# Altium PCB STM_System_Board.PCBDOC (part 14 of 16)
Units mm, origin at the board's own origin, x right, y up, seen from the top; angles counter-clockwise.
Board outline 222.53 x 100.01 mm, 6 copper layers (Top Layer, Int1 (GND), Int2 (Sign), Layer 1, Layer 2, Bottom Layer), stack 1.526 mm thick; 702 components, 774 nets, 3596 pads, 1988 vias.
Unrouted connection lines stored in the file: 1.
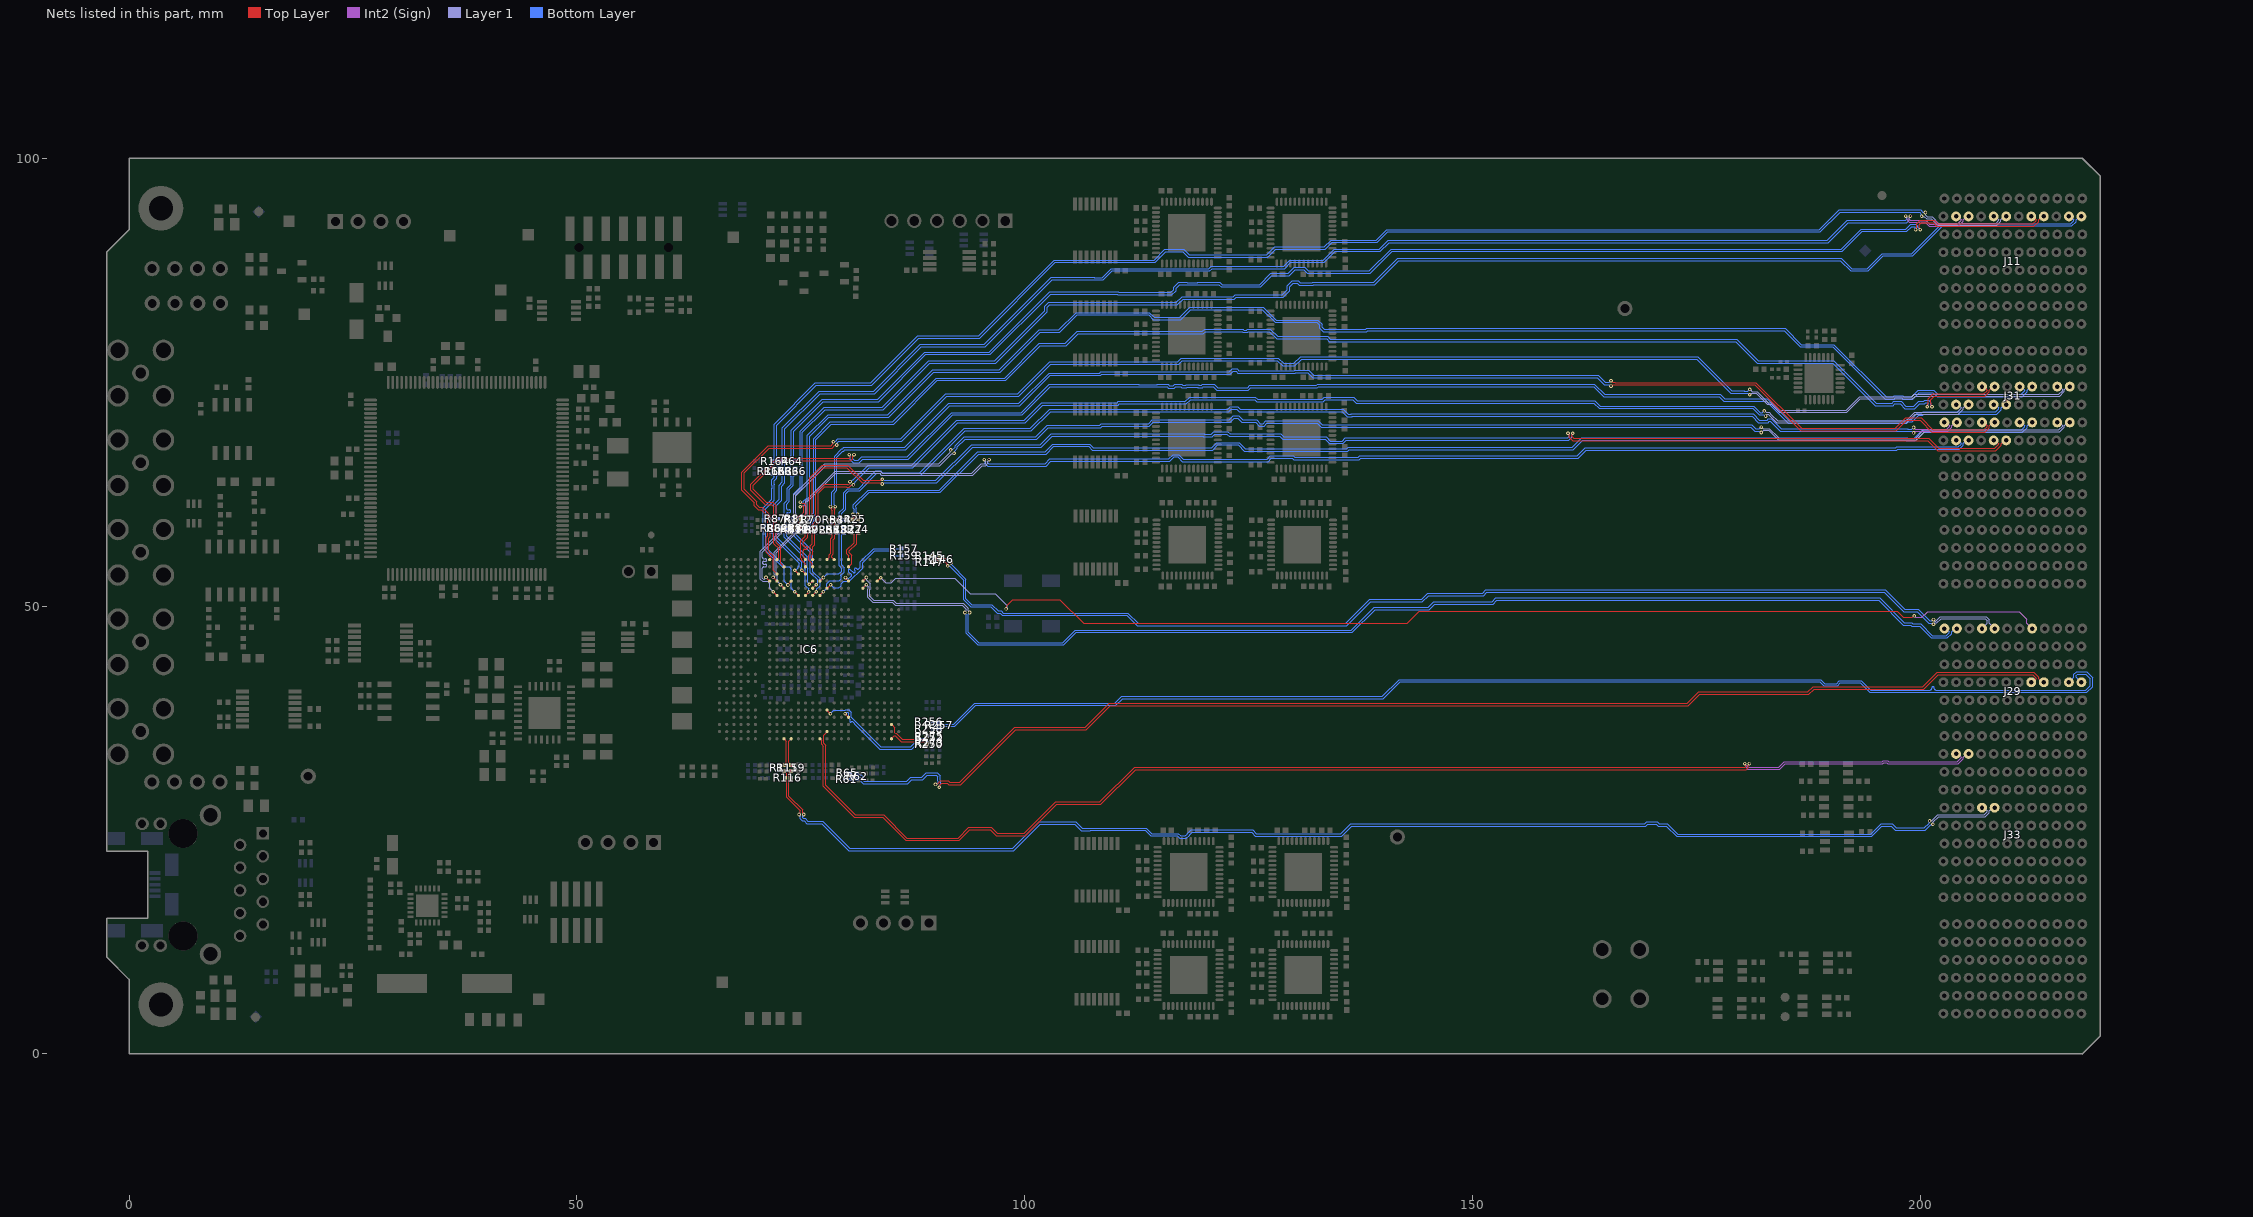
[diagram p17: the nets of this part, all layers, seen from the top]

## Via types
v1: diameter 0.4, hole 0.2, Top Layer to Bottom Layer, tented both sides, 1806 vias
v2: diameter 0.7, hole 0.4, Top Layer to Bottom Layer, tented both sides, 92 vias
v3: diameter 0.7, hole 0.4, Top Layer to Bottom Layer, 90 vias

## Nets (pads, with @x,y where several pads share a name; then routed paths per layer and width w, separated by ;. In a path a pad name is that pad's centre, name@x,y a point inside that pad or via, vN(x,y) a via of type N, cw(c..) or ccw(c..) an arc to the next point about the centre after c; other vN are vias at no path point) (continued)
SLOT7.LVDS_4_P: IC6.D4 J29.E8 | length 135.3
  Top Layer w0.095: IC6.D4@83.515,52.759 v1(83.915,53.159) ; v1(97.898,49.675) 97.956,49.733 97.956,50.009 98.664,50.717 103.894,50.717 106.56,48.051 142.673,48.051 144.038,49.415 197.375,49.415 198.025,48.765 199.067,48.765 199.197,48.895 v1(199.275,48.895)
  Int2 (Sign) w0.102: v1(199.275,48.895) 199.432,48.739 200.123,48.739 200.773,49.389 210.995,49.389 211.846,48.539 211.846,48.083 J29.E8@212.439,47.49
  Layer 1 w0.102: v1(83.915,53.159) 83.917,53.159 84.123,52.953 84.123,52.939 84.47,52.592 85.092,52.592 85.586,53.086 92.164,53.086 93.889,51.361 96.71,51.361 98.055,50.017 98.055,49.884 97.898,49.727 v1(97.898,49.675)
SLOT7.LVDS_5_N: IC6.P1 J31.H1 | length 149.4
  Top Layer w0.095: IC6.P1@75.515,55.184 75.331,55.367 75.331,55.439 75.275,55.495 75.275,55.85 75.275,56.193 cw(c75.423,56.193) 75.423,56.34 75.599,56.34 ccw(c75.599,56.488) 75.599,56.635 75.423,56.635 cw(c75.423,56.783) 75.275,56.783 75.275,57.175 75.767,57.667 75.767,59.592 76.242,60.067 76.242,64.192 77.508,65.458 80.117,65.458 81.822,63.753 83.473,63.753 83.495,63.775 83.845,63.775 83.997,63.623 v1(84.075,63.623) ; v1(161.155,69.275) 161.155,69.205 161.025,69.075 161.025,68.942 161.241,68.725 200.9,68.725 202.025,67.6 208.273,67.6 208.705,68.032 208.705,68.111 208.326,68.49 J31.H1@208.139,68.49
  Bottom Layer w0.095: v1(84.075,63.623) 84.153,63.623 84.283,63.753 90.18,63.753 94.161,67.733 101.833,67.733 103.038,68.938 119.886,68.938 119.923,68.9 120.924,68.9 121.2,69.177 122.547,69.177 122.786,68.938 128.46,68.938 128.776,68.622 133.504,68.622 133.977,68.149 135.51,68.149 135.873,68.512 160.715,68.512 161.025,68.822 161.025,69.067 161.155,69.197 v1(161.155,69.275)
SLOT7.LVDS_5_P: IC6.P2 J31.G1 | length 150.5
  Top Layer w0.095: IC6.P2@75.515,54.384 75.467,54.432 75.467,54.692 75.064,55.094 75.064,55.329 75.008,55.385 75.008,57.286 75.5,57.777 75.5,59.702 75.975,60.177 75.975,64.302 77.398,65.725 80.227,65.725 81.932,64.02 83.363,64.02 83.384,64.041 83.884,64.041 83.992,64.15 v1(84.075,64.15) ; v1(160.628,69.275) 160.628,69.205 160.758,69.075 160.758,68.831 161.131,68.459 200.789,68.459 201.914,67.333 208.384,67.333 208.972,67.921 208.972,68.111 209.352,68.49 J31.G1@209.539,68.49
  Bottom Layer w0.095: v1(84.075,64.15) 84.153,64.15 84.283,64.02 90.07,64.02 94.05,68 101.723,68 102.928,69.205 119.996,69.205 120.034,69.167 120.813,69.167 121.09,69.444 122.658,69.444 122.896,69.205 128.571,69.205 128.887,68.889 133.614,68.889 134.088,68.415 135.4,68.415 135.763,68.778 160.604,68.778 160.758,68.932 160.758,69.067 160.628,69.197 v1(160.628,69.275)
SLOT7.LVDS_6_N: IC6.U5 J31.K1 | length 145.4
  Top Layer w0.095: v1(72.724,52.375) IC6.U5@73.115,51.984
  Layer 1 w0.102: v1(72.724,52.375) 72.335,52.764 72.335,53.565 72.238,53.662 72.238,55.935 75.726,59.424 75.726,61.649 78.905,64.828 83.781,64.828 83.984,64.625 94.163,64.625 95.22,65.682 95.606,65.682 95.843,65.92 95.843,66.141 96,66.298 v1(96,66.35)
  Bottom Layer w0.095: v1(96,66.35) 96,66.272 95.87,66.142 95.87,66.008 95.983,65.895 102.267,65.895 102.798,66.425 116.073,66.425 116.558,66.91 117.169,66.91 117.698,66.382 127.028,66.382 127.396,66.75 129.981,66.75 130.139,66.592 137.215,66.592 137.398,66.775 161.675,66.775 162.55,67.65 197.225,67.65 197.34,67.765 204.194,67.765 204.505,68.077 204.505,68.156 204.171,68.49 J31.K1@203.939,68.49
SLOT7.LVDS_6_P: IC6.V4 J31.J1 | length 145.4
  Top Layer w0.095: v1(71.899,53.2) IC6.V4@72.315,52.784
  Layer 1 w0.102: v1(71.899,53.2) 71.929,53.2 72.121,53.392 72.121,53.476 72.024,53.574 72.024,56.024 75.513,59.513 75.513,61.738 78.817,65.042 83.87,65.042 84.073,64.839 94.074,64.839 95.131,65.896 95.517,65.896 95.63,66.008 95.63,66.141 95.473,66.298 v1(95.473,66.35)
  Bottom Layer w0.095: v1(95.473,66.35) 95.473,66.272 95.603,66.142 95.603,65.897 95.872,65.628 102.378,65.628 102.908,66.158 116.183,66.158 116.669,66.644 117.059,66.644 117.588,66.115 127.138,66.115 127.506,66.483 129.87,66.483 130.028,66.325 137.325,66.325 137.508,66.508 161.786,66.508 162.661,67.383 197.336,67.383 197.451,67.499 204.304,67.499 204.772,67.967 204.772,68.156 205.106,68.49 J31.J1@205.339,68.49
SLOT7.LVDS_7_N: IC6.V6 J31.C2 | length 162.2
  Top Layer w0.095: v1(71.9,51.599) IC6.V6@72.315,51.184
  Layer 1 w0.102: v1(71.9,51.599) 71.537,51.962 71.537,52.496 71.271,52.762 70.736,52.762 70.486,53.012 70.486,56.089 74.211,59.814 74.211,62.414 77.661,65.864 90.39,65.864 91.69,67.164 91.69,67.386 v1(91.727,67.423) ; v1(182.2,69.97) 182.281,69.97 182.437,69.814 183.111,69.814 184.02,68.905 184.225,68.7 199.397,68.7 200.347,69.65 215.428,69.65 215.832,70.054 215.832,70.138 215.48,70.49 J31.C2@215.239,70.49
  Bottom Layer w0.095: v1(91.727,67.423) 91.782,67.478 91.966,67.478 92.204,67.715 92.204,67.865 93.214,68.875 101.198,68.875 102.517,70.195 108.359,70.195 108.521,70.357 113.799,70.357 114.21,70.768 122.808,70.768 123.279,71.239 123.871,71.239 124.333,70.777 125.869,70.777 126.289,70.358 126.599,70.358 126.908,70.667 132.734,70.667 133.184,70.217 181.138,70.217 181.565,69.79 181.986,69.79 182.167,69.97 v1(182.2,69.97)
SLOT7.LVDS_7_P: IC6.W4 J31.B2 | length 161.7
  Top Layer w0.095: v1(71.099,53.2) IC6.W4@71.515,52.784
  Layer 1 w0.102: v1(71.099,53.2) 71.099,53.166 70.909,52.976 70.825,52.976 70.7,53.101 70.7,53.875 70.7,54.227 cw(c70.851,54.227) 70.851,54.378 71.02,54.378 ccw(c71.02,54.529) 71.02,54.68 70.851,54.68 cw(c70.851,54.831) 70.851,54.981 71.02,54.981 ccw(c71.02,55.132) 71.02,55.283 70.851,55.283 cw(c70.851,55.434) 70.7,55.434 70.7,55.725 70.7,56 74.425,59.725 74.425,62.325 77.75,65.65 90.479,65.65 91.842,67.013 92.063,67.013 v1(92.1,67.05) ; v1(182.2,69.37) 182.239,69.37 182.469,69.6 183.022,69.6 183.806,68.816 184.136,68.486 199.486,68.486 200.436,69.436 215.517,69.436 216.046,69.965 216.046,70.138 216.398,70.49 J31.B2@216.639,70.49
  Bottom Layer w0.095: v1(92.1,67.05) 92.155,67.105 92.155,67.289 92.47,67.604 92.47,67.754 93.324,68.608 101.308,68.608 102.628,69.928 108.469,69.928 108.632,70.09 113.91,70.09 114.321,70.502 122.919,70.502 123.39,70.973 123.76,70.973 124.223,70.51 125.759,70.51 126.178,70.091 126.71,70.091 127.019,70.4 132.623,70.4 133.074,69.95 181.027,69.95 181.454,69.523 181.992,69.523 182.144,69.37 v1(182.2,69.37)
SLOT7.LVDS_8_N: J31.F2 R25.1 R27.2 | length 138.9
  Top Layer w0.095: R27.2@80.729,58.9 80.729,58.92 80.926,59.117 80.926,59.444 80.912,59.458 80.912,59.5 R25.1@80.75,59.662 ; R25.1@80.73,59.662 R25.1@80.75,59.662 ; v1(80.798,60.25) 80.798,60.172 80.928,60.042 80.928,59.882 80.912,59.866 80.912,59.825 R25.1@80.75,59.662
  Bottom Layer w0.095: v1(80.798,60.25) 80.798,60.328 80.928,60.458 80.928,60.83 80.859,60.899 80.859,61.309 82.492,62.942 90.467,62.942 94.725,67.2 102.248,67.2 103.126,68.078 107.224,68.078 107.632,67.67 120.835,67.67 121.417,68.252 123.921,68.252 124.623,67.55 134.324,67.55 135.925,67.55 136.076,67.701 161.074,67.701 162.148,68.775 198.47,68.775 198.52,68.725 199.298,68.725 200.248,69.675 211.248,69.675 211.605,70.032 211.605,70.111 211.226,70.49 J31.F2@211.039,70.49
SLOT7.LVDS_8_P: J31.E2 R24.2 R25.2 | length 138.9
  Top Layer w0.095: v1(81.325,60.25) 81.325,60.167 81.195,60.037 81.195,59.88 81.207,59.868 81.207,59.825 R25.2@81.37,59.662 ; R25.2@81.39,59.662 R25.2@81.37,59.662 ; R24.2@81.415,58.9 81.415,58.92 81.193,59.142 81.193,59.444 81.207,59.458 81.207,59.5 R25.2@81.37,59.662
  Bottom Layer w0.095: v1(81.325,60.25) 81.325,60.328 81.195,60.458 81.195,60.941 81.126,61.01 81.126,61.198 82.602,62.675 90.577,62.675 94.836,66.933 102.358,66.933 103.236,67.812 107.114,67.812 107.522,67.403 120.945,67.403 121.527,67.985 123.81,67.985 124.512,67.283 134.214,67.283 136.036,67.283 136.187,67.434 161.184,67.434 162.258,68.508 198.36,68.508 198.41,68.458 199.408,68.458 200.358,69.408 211.359,69.408 211.872,69.921 211.872,70.111 212.252,70.49 J31.E2@212.439,70.49
SLOT7.LVDS_9_N: J31.I2 R54.1 R57.2 | length 146
  Top Layer w0.095: R57.2@78.262,58.848 78.262,58.868 78.424,59.03 78.436,59.03 78.492,59.086 78.492,59.404 78.478,59.418 78.478,59.46 R54.1@78.315,59.622 ; R54.1@78.295,59.622 R54.1@78.315,59.622 ; v1(78.298,61.1) 78.298,61.022 78.428,60.892 78.428,60.701 78.492,60.637 78.492,59.84 78.478,59.826 78.478,59.785 R54.1@78.315,59.622 ; v1(165.425,75.145) 165.458,75.145 165.639,74.964 165.867,74.964 165.89,74.942 181.608,74.942 186.733,69.817 197.164,69.817 198.339,70.992 200.033,70.992 201.35,69.675 207.048,69.675 207.405,70.032 207.405,70.111 207.026,70.49 J31.I2@206.839,70.49
  Bottom Layer w0.095: v1(78.298,61.1) 78.298,61.178 78.428,61.308 78.428,62.705 78.758,63.036 78.758,66.715 79.584,67.541 79.646,67.541 79.805,67.7 86.598,67.7 91.523,72.625 99.325,72.625 102.711,76.011 108.334,76.011 108.459,76.135 122.828,76.135 123.159,76.466 123.691,76.466 123.894,76.263 124.538,76.263 124.545,76.256 124.855,76.256 124.862,76.263 130.054,76.263 130.103,76.312 131.713,76.312 132.258,75.767 163.987,75.767 164.79,74.964 165.211,74.964 165.392,75.145 v1(165.425,75.145)
SLOT7.LVDS_9_P: J31.H2 R53.2 R54.2 | length 146
  Top Layer w0.095: v1(78.825,61.1) 78.825,61.022 78.695,60.892 78.695,60.812 78.759,60.748 78.759,59.84 78.773,59.826 78.773,59.785 R54.2@78.935,59.622 ; R54.2@78.955,59.622 R54.2@78.935,59.622 ; R53.2@78.999,58.848 78.999,58.868 78.836,59.03 78.819,59.03 78.759,59.091 78.759,59.404 78.773,59.418 78.773,59.46 R54.2@78.935,59.622 ; v1(165.425,74.545) 165.481,74.545 165.633,74.697 165.757,74.697 165.779,74.675 181.498,74.675 186.623,69.55 197.275,69.55 198.45,70.725 199.923,70.725 201.24,69.408 207.159,69.408 207.672,69.921 207.672,70.111 208.052,70.49 J31.H2@208.239,70.49
  Bottom Layer w0.095: v1(78.825,61.1) 78.825,61.178 78.695,61.308 78.695,62.595 79.025,62.925 79.025,66.605 79.695,67.275 79.756,67.275 79.915,67.433 86.708,67.433 91.633,72.358 99.436,72.358 102.821,75.744 108.445,75.744 108.569,75.869 122.939,75.869 123.27,76.199 123.58,76.199 123.784,75.996 124.427,75.996 124.434,75.989 124.966,75.989 124.973,75.996 130.164,75.996 130.214,76.046 131.602,76.046 132.148,75.5 163.877,75.5 164.679,74.697 165.217,74.697 165.369,74.545 v1(165.425,74.545)
SLOT7.LVDS_10_N: J31.L2 R34.1 R48.2 | length 134.2
  Int2 (Sign) w0.102: v1(199.2,69.93) 199.216,69.93 199.409,69.737 201.465,69.737 202.915,69.737 203.232,70.054 203.232,70.138 202.88,70.49 J31.L2@202.639,70.49
  Bottom Layer w0.095: R48.2@79.03,58.848 79.03,58.868 79.192,59.03 79.234,59.03 79.296,59.092 79.296,59.405 79.281,59.419 79.281,59.46 R34.1@79.119,59.623 ; R34.1@79.099,59.623 R34.1@79.119,59.623 ; v1(199.2,69.93) 199.167,69.93 198.986,69.749 198.565,69.749 198.551,69.763 184.414,69.763 183.299,70.878 182.999,70.878 182.87,70.749 181.995,70.749 181.294,71.45 136.452,71.45 136.422,71.42 136.082,71.42 135.536,71.967 124.044,71.967 123.77,72.241 122.907,72.241 122.623,71.958 102.755,71.958 100.623,69.825 93.223,69.825 88.289,64.892 84.09,64.892 83.891,65.091 83.334,65.091 82.35,64.107 82.35,64.021 81.446,63.117 80.214,63.117 79.758,62.661 79.758,60.908 79.296,60.446 79.296,59.841 79.281,59.827 79.281,59.785 R34.1@79.119,59.623
SLOT7.LVDS_10_P: J31.K2 R32.2 R34.2 | length 134.1
  Int2 (Sign) w0.102: v1(199.2,69.33) 199.216,69.33 199.409,69.523 201.377,69.523 203.003,69.523 203.446,69.965 203.446,70.138 203.798,70.49 J31.K2@204.039,70.49
  Bottom Layer w0.095: R34.2@79.759,59.623 R34.2@79.739,59.623 ; R32.2@79.812,58.837 79.812,58.857 79.649,59.019 79.618,59.019 79.562,59.075 79.562,59.405 79.576,59.419 79.576,59.46 R34.2@79.739,59.623 ; v1(199.2,69.33) 199.144,69.33 198.992,69.482 198.454,69.482 198.44,69.496 184.304,69.496 183.188,70.612 183.11,70.612 182.98,70.482 181.884,70.482 181.183,71.183 136.563,71.183 136.533,71.153 135.972,71.153 135.425,71.7 123.934,71.7 123.659,71.974 123.017,71.974 122.734,71.691 102.866,71.691 100.733,69.558 93.333,69.558 88.4,64.625 83.98,64.625 83.78,64.825 83.445,64.825 82.617,63.997 82.617,63.91 81.557,62.85 80.325,62.85 80.025,62.55 80.025,60.798 79.562,60.335 79.562,59.841 79.576,59.827 79.576,59.785 R34.2@79.739,59.623
SLOT7.LVDS_11_N: J11.B7 R81.1 R83.2 | length 165.5
  Bottom Layer w0.095: R83.2@74.015,58.997 74.015,59.017 74.177,59.179 74.207,59.179 74.262,59.235 74.262,59.541 74.248,59.555 74.248,59.596 R81.1@74.086,59.759 ; R81.1@74.066,59.759 R81.1@74.086,59.759 ; J11.B7@216.539,93.49 216.726,93.49 217.105,93.111 217.105,93.032 216.773,92.7 202.35,92.7 199,89.35 195.723,89.35 194.048,87.675 192.275,87.675 191.133,88.817 141.64,88.817 138.954,86.131 132.139,86.131 132.1,86.092 130.715,86.092 130.491,86.315 129.863,86.315 129.283,85.736 129.283,85.279 128.754,84.75 123.456,84.75 123.244,84.538 122.412,84.538 117.56,84.538 116.91,83.887 102.659,83.887 102.233,83.461 102.233,82.986 96.623,77.375 89.248,77.375 84.074,72.201 77.624,72.201 74.908,69.486 74.908,63.258 74.183,62.533 74.183,60.26 74.262,60.181 74.262,59.977 74.248,59.963 74.248,59.921 R81.1@74.086,59.759
SLOT7.LVDS_11_P: J11.A7 R80.2 R81.2 | length 165.5
  Bottom Layer w0.095: R81.2@74.726,59.759 R81.2@74.706,59.759 ; R80.2@74.776,58.996 74.776,59.016 74.614,59.179 74.585,59.179 74.529,59.235 74.529,59.541 74.543,59.555 74.543,59.596 R81.2@74.706,59.759 ; J11.A7@217.939,93.49 217.752,93.49 217.372,93.111 217.372,92.921 216.884,92.433 202.461,92.433 199.111,89.083 195.833,89.083 194.158,87.408 192.164,87.408 191.023,88.55 141.75,88.55 139.064,85.864 132.25,85.864 132.21,85.825 130.605,85.825 130.381,86.049 129.974,86.049 129.55,85.625 129.55,85.169 128.865,84.483 123.566,84.483 123.354,84.271 122.302,84.271 117.671,84.271 117.02,83.62 102.77,83.62 102.5,83.35 102.5,82.875 96.733,77.108 89.358,77.108 84.184,71.934 77.734,71.934 75.175,69.375 75.175,63.148 74.45,62.423 74.45,60.37 74.529,60.291 74.529,59.977 74.543,59.963 74.543,59.921 R81.2@74.706,59.759
SLOT7.LVDS_12_N: J11.E7 R64.1 R66.2 | length 155.5
  Top Layer w0.095: v1(199.428,92.025) 199.428,92.108 199.558,92.238 199.558,92.661 199.94,93.042 201.508,93.042 201.9,92.65 212.523,92.65 212.905,93.032 212.905,93.111 212.526,93.49 J11.E7@212.339,93.49
  Bottom Layer w0.095: R64.1@74.355,66.152 R64.1@74.335,66.152 ; R66.2@74.404,65.388 74.404,65.408 74.241,65.571 74.219,65.571 74.158,65.631 74.158,65.934 74.172,65.948 74.172,65.99 R64.1@74.335,66.152 ; v1(199.428,92.025) 199.41,92.044 199.41,92.301 199.354,92.356 199.006,92.356 198.458,91.808 193.485,91.808 191.261,89.583 140.983,89.583 138.558,87.158 131.531,87.158 131.143,87.546 130.171,87.546 129.498,86.873 127.573,86.873 126.314,85.614 121.911,85.614 121.653,85.871 119.43,85.871 119.403,85.845 118.009,85.845 117.983,85.871 117.267,85.871 116.877,85.481 116.877,85.218 116.41,84.751 110.354,84.751 110.284,84.821 102.896,84.821 96.158,78.083 88.933,78.083 83.659,72.809 77.509,72.809 74.2,69.5 74.2,66.684 74.158,66.642 74.158,66.37 74.172,66.356 74.172,66.315 R64.1@74.335,66.152
SLOT7.LVDS_12_P: J11.D7 R63.2 R64.2 | length 156.5
  Top Layer w0.095: v1(199.955,92.025) 199.955,92.108 199.825,92.238 199.825,92.55 200.05,92.775 201.398,92.775 201.789,92.383 212.634,92.383 213.172,92.921 213.172,93.111 213.552,93.49 J11.D7@213.739,93.49
  Bottom Layer w0.095: R63.2@73.655,65.389 73.655,65.409 73.817,65.572 73.836,65.572 73.892,65.627 73.892,65.934 73.877,65.948 73.877,65.99 R64.2@73.715,66.152 ; R64.2@73.695,66.152 R64.2@73.715,66.152 ; v1(199.955,92.025) 199.955,92.028 199.679,92.303 199.679,92.408 199.464,92.623 198.896,92.623 198.347,92.074 193.374,92.074 191.15,89.85 140.873,89.85 138.448,87.425 131.641,87.425 131.254,87.812 130.06,87.812 129.387,87.14 127.462,87.14 126.203,85.881 122.021,85.881 121.764,86.138 119.32,86.138 119.293,86.111 118.12,86.111 118.093,86.138 117.156,86.138 116.61,85.592 116.61,85.328 116.299,85.017 110.465,85.017 110.395,85.088 102.785,85.088 96.048,78.35 88.823,78.35 83.549,73.076 77.399,73.076 73.933,69.611 73.933,66.795 73.892,66.753 73.892,66.37 73.877,66.356 73.877,66.315 R64.2@73.715,66.152
SLOT7.LVDS_13_N: J11.H7 R164.1 R165.2 | length 154.1
  Layer 1 w0.102: v1(200.525,93.925) 200.552,93.898 200.552,93.623 200.736,93.439 201.261,93.439 201.975,92.725 208.403,92.725 208.732,93.054 208.732,93.138 208.38,93.49 J11.H7@208.139,93.49
  Bottom Layer w0.095: R165.2@71.767,65.389 71.767,65.409 71.93,65.572 71.956,65.572 72.012,65.627 72.012,65.959 71.998,65.973 71.998,66.014 R164.1@71.835,66.177 ; R164.1@71.815,66.177 R164.1@71.835,66.177 ; v1(200.525,93.925) 200.502,93.948 200.246,93.948 199.978,94.217 190.889,94.217 188.698,92.025 140.398,92.025 139.223,90.85 134.173,90.85 133.423,90.1 127.898,90.1 127.023,89.225 118.35,89.225 117.758,89.817 115.639,89.817 114.448,88.625 103.298,88.625 94.848,80.175 88.048,80.175 82.773,74.9 76.598,74.9 72.012,70.314 72.012,66.395 71.998,66.381 71.998,66.339 R164.1@71.835,66.177
SLOT7.LVDS_13_P: J11.G7 R163.2 R164.2 | length 153.9
  Layer 1 w0.102: v1(200.101,93.501) 200.143,93.459 200.414,93.459 200.647,93.225 201.172,93.225 201.886,92.511 208.492,92.511 208.946,92.965 208.946,93.138 209.298,93.49 J11.G7@209.539,93.49
  Bottom Layer w0.095: R164.2@72.475,66.177 R164.2@72.455,66.177 ; R163.2@72.542,65.394 72.542,65.414 72.38,65.576 72.343,65.576 72.279,65.64 72.279,65.959 72.293,65.973 72.293,66.014 R164.2@72.455,66.177 ; v1(200.101,93.501) 200.061,93.54 200.061,93.756 199.867,93.95 191,93.95 188.808,91.758 140.508,91.758 139.333,90.583 134.283,90.583 133.533,89.833 128.008,89.833 127.133,88.958 118.239,88.958 117.648,89.55 115.75,89.55 114.558,88.358 103.408,88.358 94.958,79.908 88.158,79.908 82.883,74.633 76.708,74.633 72.279,70.204 72.279,66.395 72.293,66.381 72.293,66.339 R164.2@72.455,66.177
SLOT7.LVDS_14_N: J11.K7 R87.1 R89.2 | length 154.4
  Int2 (Sign) w0.102: v1(198.85,93.525) 198.85,93.473 198.693,93.316 198.693,93.183 198.81,93.067 199.87,93.067 199.923,93.014 200.629,93.014 201.018,92.625 204.103,92.625 204.532,93.054 204.532,93.138 204.18,93.49 J11.K7@203.939,93.49
  Bottom Layer w0.095: R89.2@72.441,58.999 72.441,59.019 72.244,59.216 72.244,59.736 72.244,61.217 72.842,61.814 72.842,63.389 73.204,63.752 73.204,69.777 77.149,73.722 83.222,73.722 88.433,78.933 95.558,78.933 103.033,86.408 107.604,86.408 107.608,86.405 108.755,86.405 109.75,87.4 120.625,87.4 120.9,87.675 129.023,87.675 129.7,88.352 133.402,88.352 134.633,89.583 139.683,89.583 140.658,90.558 189.658,90.558 191.91,92.81 198.458,92.81 198.72,93.072 198.72,93.317 198.85,93.447 v1(198.85,93.525)
SLOT7.LVDS_14_P: J11.J7 R86.2 R87.2 | length 155.2
  Int2 (Sign) w0.102: v1(198.323,93.525) 198.323,93.473 198.48,93.316 198.48,93.095 198.721,92.853 199.781,92.853 199.834,92.8 200.541,92.8 200.93,92.411 204.192,92.411 204.746,92.965 204.746,93.138 205.098,93.49 J11.J7@205.339,93.49
  Bottom Layer w0.095: R86.2@71.679,58.999 71.679,59.019 71.841,59.182 71.87,59.182 71.977,59.288 71.977,59.736 71.977,61.327 72.575,61.925 72.575,63.5 72.937,63.862 72.937,69.887 77.039,73.989 83.111,73.989 88.323,79.2 95.448,79.2 102.923,86.675 107.715,86.675 107.719,86.671 108.644,86.671 109.64,87.667 120.514,87.667 120.789,87.942 128.912,87.942 129.589,88.619 133.292,88.619 134.523,89.85 139.573,89.85 140.548,90.825 189.548,90.825 191.8,93.077 198.347,93.077 198.453,93.182 198.453,93.317 198.323,93.447 v1(198.323,93.525)
SLOT7.LVDS_15_N: J33.I6 R116.1 R119.2 | length 145.7
  Top Layer w0.095: R116.1@73.861,30.815 R116.1@73.841,30.815 ; R119.2@73.897,31.602 73.897,31.582 73.735,31.42 73.72,31.42 73.665,31.364 73.665,31.033 73.679,31.019 73.679,30.977 R116.1@73.841,30.815 ; v1(75.325,26.725) 75.325,26.803 75.195,26.933 75.195,27.255 73.665,28.785 73.665,30.597 73.679,30.611 73.679,30.652 R116.1@73.841,30.815
  Layer 1 w0.102: v1(200.988,26.012) 201.025,26.049 201.246,26.049 201.786,26.588 201.911,26.713 202.193,26.713 202.2,26.721 207.099,26.721 207.425,27.046 207.425,27.131 207.065,27.49 J33.I6@206.839,27.49
  Bottom Layer w0.095: v1(75.325,26.725) 75.325,26.647 75.195,26.517 75.195,26.343 75.251,26.287 75.463,26.287 75.783,25.967 77.433,25.967 80.425,22.975 98.648,22.975 101.589,25.917 105.658,25.917 106.4,25.175 107.205,25.175 107.244,25.215 113.538,25.215 114.149,24.603 117.122,24.603 117.39,24.335 117.917,24.335 118.114,24.532 118.114,24.567 118.564,25.016 125.409,25.016 125.83,24.595 135.268,24.595 136.363,25.691 140.875,25.691 169.183,25.691 169.406,25.914 170.573,25.914 170.796,25.691 171.709,25.691 172.85,24.55 194.425,24.55 195.566,25.691 196.834,25.691 197.275,25.25 200.41,25.25 200.933,25.773 200.933,25.957 v1(200.988,26.012)
SLOT7.LVDS_15_P: J33.H6 R115.2 R116.2 | length 146.6
  Top Layer w0.095: R115.2@73.146,31.599 73.146,31.579 73.308,31.416 73.333,31.416 73.398,31.351 73.398,31.033 73.384,31.019 73.384,30.977 R116.2@73.221,30.815 ; R116.2@73.201,30.815 R116.2@73.221,30.815 ; v1(74.798,26.725) 74.798,26.803 74.928,26.933 74.928,27.145 73.398,28.675 73.398,30.597 73.384,30.611 73.384,30.652 R116.2@73.221,30.815
  Layer 1 w0.102: v1(201.361,25.639) 201.398,25.676 201.398,25.898 202,26.5 202.193,26.5 202.2,26.492 207.194,26.492 207.653,26.952 207.653,27.131 208.013,27.49 J33.H6@208.239,27.49
  Bottom Layer w0.095: v1(74.798,26.725) 74.798,26.647 74.928,26.517 74.928,26.233 75.14,26.021 75.352,26.021 75.673,25.7 77.323,25.7 80.315,22.708 98.758,22.708 101.7,25.65 105.548,25.65 106.289,24.909 107.316,24.909 107.355,24.948 113.427,24.948 114.039,24.336 117.011,24.336 117.279,24.068 118.028,24.068 118.381,24.421 118.381,24.456 118.674,24.75 125.298,24.75 125.72,24.328 135.378,24.328 136.474,25.424 140.875,25.424 169.293,25.424 169.517,25.648 170.462,25.648 170.686,25.424 171.599,25.424 172.739,24.283 194.536,24.283 195.676,25.424 196.724,25.424 197.164,24.983 200.521,24.983 201.122,25.584 201.306,25.584 v1(201.361,25.639)
SLOT7.LVDSr0_N: IC6.L22 R275.1 | length 14.1
  Top Layer w0.095: IC6.L22@77.89,38.384 v1(78.29,37.984)
  Bottom Layer w0.095: v1(78.29,37.984) 78.664,38.359 79.972,38.359 80.023,38.41 80.352,38.41 80.629,38.132 80.629,37.566 83.914,34.281 87.281,34.281 88.231,35.231 88.83,35.231 88.886,35.287 88.886,35.321 89.048,35.484 R275.1@89.068,35.484
SLOT7.LVDSr0_P: IC6.H23 R273.1 | length 12.5
  Top Layer w0.095: v1(79.925,37.975) 80.29,37.61 IC6.H23@80.29,37.584
  Bottom Layer w0.095: v1(79.925,37.975) 79.965,37.975 80.133,38.143 80.242,38.143 80.363,38.022 80.363,37.688 80.363,37.456 80.487,37.331 cw(c80.418,37.262) 80.487,37.193 80.483,37.19 ccw(c80.552,37.121) 80.483,37.052 ccw(c80.552,37.121) 80.621,37.052 80.625,37.055 cw(c80.694,36.986) 80.763,37.055 81.113,36.705 81.147,36.672 83.804,34.014 87.392,34.014 88.342,34.964 88.83,34.964 88.886,34.909 88.886,34.874 89.048,34.712 R273.1@89.068,34.712
SLOT7.LVDSr1_N: IC6.B24 R252.1 | length 5
  Top Layer w0.095: IC6.B24@85.115,36.784 85.48,36.419 85.48,35.871 85.575,35.776 85.629,35.776 86.293,35.112 88.755,35.112 88.811,35.168 88.811,35.202 88.973,35.364 R252.1@88.993,35.364
SLOT7.LVDSr1_P: IC6.B26 R250.1 | length 4.4
  Top Layer w0.095: IC6.B26@85.115,35.184 85.44,35.509 85.519,35.509 86.182,34.845 88.755,34.845 88.811,34.79 88.811,34.755 88.973,34.593 R250.1@88.993,34.593
SLOT7.LVDSr3_N: IC6.L5 R159.1 | length 11
  Top Layer w0.095: IC6.L5@77.915,51.984 v1(78.315,52.384)
  Bottom Layer w0.095: v1(78.315,52.384) 78.682,52.016 79.24,52.016 79.5,52.276 79.5,52.499 79.76,52.759 80.42,52.759 81.883,54.222 81.883,54.804 83.223,56.143 85.02,56.143 85.526,55.638 R159.1@86.232,55.638
SLOT7.LVDSr3_P: IC6.H4 R157.1 | length 10.2
  Top Layer w0.095: v1(79.975,53.175) 79.975,53.124 IC6.H4@80.315,52.784
  Bottom Layer w0.095: v1(79.975,53.175) 80.033,53.175 80.183,53.025 80.31,53.025 80.58,53.295 80.613,53.329 ccw(c80.509,53.433) 80.613,53.538 80.309,53.842 cw(c80.413,53.946) 80.309,54.05 cw(c80.413,53.946) 80.518,54.05 80.822,53.746 ccw(c80.926,53.85) 81.03,53.746 ccw(c80.926,53.85) 81.03,53.955 81.014,53.971 cw(c81.118,54.076) 81.014,54.18 cw(c81.118,54.076) 81.223,54.18 81.239,54.163 ccw(c81.343,54.268) 81.448,54.163 81.605,54.32 81.617,54.332 81.617,54.915 83.112,56.41 86.22,56.41 R157.1@86.229,56.419
SLOT7.LVDSr8_N: IC6.H1 R27.1 | length 3.6
  Top Layer w0.095: IC6.H1@80.315,55.184 80.36,55.229 80.36,55.588 80.116,55.832 80.116,56.266 80.939,57.089 80.939,57.56 80.939,58.01 80.729,58.22 R27.1@80.729,58.24
SLOT7.LVDSr8_P: IC6.H2 R24.1 | length 4.5
  Top Layer w0.095: IC6.H2@80.315,54.384 80.664,54.734 80.664,55.661 80.383,55.942 80.383,56.156 81.205,56.978 81.205,57.45 81.206,58.011 81.415,58.22 R24.1@81.415,58.24
SLOT7.LVDSr9_N: IC6.L1 R57.1 | length 3.4
  Top Layer w0.095: IC6.L1@77.915,55.184 78.182,55.451 78.182,55.745 78.355,55.919 78.355,57.508 78.497,57.65 78.497,57.949 78.441,58.005 78.424,58.005 78.262,58.168 R57.1@78.262,58.188
SLOT7.LVDSr9_P: IC6.K1 R53.1 | length 3.4
  Top Layer w0.095: IC6.K1@78.715,55.184 78.448,55.451 78.448,55.635 78.622,55.808 78.622,57.398 78.764,57.539 78.764,57.949 78.819,58.005 78.836,58.005 78.999,58.168 R53.1@78.999,58.188
SLOT7.LVDSr10_N: IC6.M4 R48.1 | length 7.4
  Top Layer w0.095: IC6.M4@77.115,52.784 v1(77.515,53.184)
  Bottom Layer w0.095: v1(77.515,53.184) 77.915,53.584 79.245,53.584 79.568,53.907 79.568,54.18 79.274,54.474 79.274,55.05 79.282,55.058 79.282,57.95 79.226,58.005 79.192,58.005 79.03,58.168 R48.1@79.03,58.188
SLOT7.LVDSr10_P: IC6.M6 R32.1 | length 9
  Top Layer w0.095: IC6.M6@77.115,51.184 v1(77.515,51.584)
  Bottom Layer w0.095: v1(77.515,51.584) 77.892,51.961 77.892,52.491 78.211,52.81 79.27,52.81 79.489,53.029 79.489,53.339 79.473,53.356 79.473,53.435 79.835,53.797 79.835,54.29 79.54,54.585 79.54,54.939 79.549,54.947 79.549,57.939 79.604,57.994 79.649,57.994 79.812,58.157 R32.1@79.812,58.177
SLOT7.LVDSr11_N: IC6.N5 R83.1 | length 7.8
  Top Layer w0.095: IC6.N5@76.315,51.984 76.7,52.369 v1(76.7,52.375)
  Bottom Layer w0.095: R83.1@74.015,58.337 74.015,58.317 74.177,58.154 74.206,58.154 74.262,58.099 74.262,57.786 76.059,55.989 76.059,53.733 76.874,52.918 76.874,52.583 76.7,52.409 v1(76.7,52.375)
SLOT7.LVDSr11_P: IC6.N6 R80.1 | length 8.7
  Top Layer w0.095: IC6.N6@76.315,51.184 v1(76.715,51.584)
  Bottom Layer w0.095: R80.1@74.776,58.336 74.776,58.316 74.614,58.154 74.584,58.154 74.529,58.098 74.529,57.896 76.325,56.1 76.325,53.844 77.14,53.029 77.14,52.282 76.773,51.915 76.773,51.642 v1(76.715,51.584)
SLOT7.LVDSr12_N: IC6.N4 R66.1 | length 15
  Top Layer w0.095: v1(75.925,52.425) 75.94,52.425 76.299,52.784 IC6.N4@76.309,52.784
  Bottom Layer w0.095: R66.1@74.404,64.728 74.404,64.708 74.241,64.546 74.218,64.546 74.162,64.49 74.162,63.462 73.717,63.017 73.717,61.692 73.4,61.375 73.4,61.15 73.4,60.883 ccw(c73.548,60.883) 73.548,60.735 73.724,60.735 cw(c73.724,60.588) 73.724,60.44 73.548,60.44 ccw(c73.548,60.293) 73.4,60.293 73.4,59.95 73.4,57.8 75.717,55.483 75.717,54.289 75.766,54.24 75.766,52.934 75.765,52.933 75.765,52.633 75.925,52.473 v1(75.925,52.425)
SLOT7.LVDSr12_P: IC6.P6 R63.1 | length 15.3
  Top Layer w0.095: IC6.P6@75.515,51.184 75.515,51.199 75.875,51.56 v1(75.875,51.575)
  Bottom Layer w0.095: R63.1@73.655,64.729 73.655,64.709 73.817,64.547 73.84,64.547 73.896,64.491 73.896,63.573 73.45,63.127 73.45,61.802 73.133,61.486 73.133,57.689 75.45,55.373 75.45,54.179 75.5,54.129 75.5,53.045 75.498,53.044 75.498,52.278 75.859,51.918 75.859,51.591 v1(75.875,51.575)
SLOT7.LVDSr13_N: IC6.T4 R165.1 | length 14.8
  Top Layer w0.095: v1(73.55,52.35) 73.55,52.419 IC6.T4@73.915,52.784
  Bottom Layer w0.095: R165.1@71.767,64.729 71.767,64.709 71.93,64.547 71.967,64.547 72.022,64.491 72.022,64.357 71.75,64.084 71.75,63.48 71.774,63.455 71.774,63.145 71.75,63.12 71.75,61.897 70.808,60.956 70.808,56.467 73.14,54.135 73.14,52.76 v1(73.55,52.35)
SLOT7.LVDSr13_P: IC6.R6 R163.1 | length 15.9
  Top Layer w0.095: v1(74.315,51.584) IC6.R6@74.715,51.184
  Bottom Layer w0.095: R163.1@72.542,64.734 72.542,64.714 72.38,64.551 72.345,64.551 72.289,64.495 72.289,64.246 72.016,63.973 72.016,63.591 72.041,63.566 72.041,63.034 72.016,63.009 72.016,61.787 71.075,60.845 71.075,56.577 73.269,54.384 73.67,54.384 73.925,54.129 73.925,51.974 v1(74.315,51.584)
SLOT7.LVDSr14_N: IC6.P3 R89.1 | length 6.3
  Top Layer w0.095: v1(75.115,53.984) IC6.P3@75.515,53.584
  Bottom Layer w0.095: R89.1@72.441,58.339 72.441,58.319 72.278,58.157 72.249,58.157 72.193,58.101 72.193,57.802 75.092,54.902 75.092,54.371 74.992,54.271 74.992,54.189 75.115,54.067 v1(75.115,53.984)
SLOT7.LVDSr14_P: IC6.R3 R86.1 | length 6.5
  Top Layer w0.095: v1(74.315,53.984) IC6.R3@74.715,53.584
  Bottom Layer w0.095: R86.1@71.679,58.339 71.679,58.319 71.841,58.157 71.871,58.157 71.926,58.101 71.926,57.691 74.826,54.792 74.826,54.482 74.725,54.381 74.725,54.267 74.501,54.042 74.373,54.042 v1(74.315,53.984)
SLOT7.LVDSr15_N: IC6.T26 R119.1 | length 3.1
  Top Layer w0.095: R119.1@73.897,32.262 73.897,32.282 73.735,32.445 73.71,32.445 73.654,32.501 73.654,33.854 73.648,33.859 73.648,34.917 IC6.T26@73.915,35.184
SLOT7.LVDSr15_P: IC6.U26 R115.1 | length 3.2
  Top Layer w0.095: IC6.U26@73.115,35.184 73.382,34.917 73.382,33.749 73.387,33.743 73.387,32.497 73.332,32.441 73.308,32.441 73.146,32.279 R115.1@73.146,32.259
SLOT8.LVDS_0_N: J29.B5 R257.1 R258.2 | length 137.5
  Bottom Layer w0.095: R258.2@89.678,36.299 89.698,36.299 89.861,36.461 89.861,36.496 89.916,36.551 90.207,36.551 90.22,36.538 90.262,36.538 R257.1@90.425,36.376 ; R257.1@90.425,36.356 R257.1@90.425,36.376 ; J29.B5@216.539,41.49 217.105,42.057 217.105,42.361 217.412,42.667 218.536,42.667 219.192,42.011 219.192,41.015 218.536,40.358 194.289,40.358 193.239,41.408 191.036,41.408 190.711,41.083 189.192,41.083 188.75,41.525 141.9,41.525 140.025,39.65 110.9,39.65 110.15,38.9 94.507,38.9 92.159,36.552 90.643,36.552 90.629,36.538 90.587,36.538 R257.1@90.425,36.376
SLOT8.LVDS_0_P: J29.A5 R256.2 R257.2 | length 136.6
  Bottom Layer w0.095: R256.2@89.678,37.07 89.698,37.07 89.861,36.908 89.861,36.874 89.916,36.818 90.206,36.818 90.221,36.833 90.262,36.833 R257.2@90.425,36.996 ; R257.2@90.425,37.016 R257.2@90.425,36.996 ; J29.A5@217.939,41.49 217.372,42.057 217.372,42.25 217.522,42.4 218.425,42.4 218.925,41.9 218.925,41.125 218.425,40.625 202.625,40.625 201.663,40.625 cw(c201.663,40.772) 201.515,40.772 201.515,40.84 ccw(c201.368,40.84) 201.22,40.84 201.22,40.772 cw(c201.073,40.772) 201.073,40.625 201.025,40.625 194.4,40.625 193.35,41.675 190.925,41.675 190.6,41.35 189.302,41.35 188.861,41.792 141.79,41.792 139.915,39.917 110.789,39.917 110.04,39.167 94.397,39.167 92.049,36.819 90.643,36.819 90.629,36.833 90.587,36.833 R257.2@90.425,36.996
SLOT8.LVDS_1_N: J29.E5 R62.1 R65.2 | length 141.6
  Top Layer w0.095: v1(90.448,29.775) 90.505,29.832 90.505,30.012 90.726,30.233 91.342,30.233 91.5,30.075 92.852,30.075 98.965,36.187 106.84,36.187 109.511,38.858 174.036,38.858 175.336,40.158 187.525,40.158 188.092,40.725 200.352,40.725 201.977,42.35 212.503,42.35 212.905,41.948 212.905,41.869 212.526,41.49 J29.E5@212.339,41.49
  Bottom Layer w0.095: R65.2@80.478,31.364 80.498,31.364 80.66,31.202 80.66,31.198 80.716,31.142 81.047,31.142 81.061,31.156 81.103,31.156 R62.1@81.265,31.319 ; R62.1@81.265,31.339 R62.1@81.265,31.319 ; v1(90.448,29.775) 90.505,29.832 90.505,30.012 90.623,30.13 90.623,30.449 90.542,30.53 90.542,31.036 90.211,31.367 88.967,31.367 88.463,30.863 87.285,30.863 86.839,30.417 82.046,30.417 81.98,30.483 81.98,30.891 81.728,31.142 81.483,31.142 81.469,31.156 81.428,31.156 R62.1@81.265,31.319
SLOT8.LVDS_1_P: J29.D5 R61.2 R62.2 | length 141.8
  Top Layer w0.095: v1(90.024,30.088) 90.081,30.145 90.261,30.145 90.616,30.5 91.452,30.5 91.611,30.342 92.742,30.342 98.854,36.454 106.729,36.454 109.4,39.125 173.925,39.125 175.225,40.425 187.414,40.425 187.981,40.992 200.242,40.992 201.867,42.617 212.614,42.617 213.172,42.058 213.172,41.869 213.552,41.49 J29.D5@213.739,41.49
  Bottom Layer w0.095: R61.2@80.452,30.653 80.472,30.653 80.694,30.875 81.047,30.875 81.061,30.861 81.103,30.861 R62.2@81.265,30.699 ; R62.2@81.265,30.679 R62.2@81.265,30.699 ; v1(90.024,30.088) 90.081,30.145 90.261,30.145 90.356,30.24 90.356,30.338 90.275,30.419 90.275,30.925 90.1,31.1 89.077,31.1 88.573,30.596 87.396,30.596 86.95,30.15 81.935,30.15 81.713,30.372 81.713,30.78 81.618,30.875 81.483,30.875 81.469,30.861 81.428,30.861 R62.2@81.265,30.699
SLOT8.LVDS_2_N: IC6.M26 J29.K1 | length 141.2
  Top Layer w0.095: IC6.M26@77.115,35.184 77.299,35.001 77.299,34.576 77.5,34.375 77.5,29.873 80.964,26.408 84.114,26.408 86.689,23.833 92.679,23.833 93.87,25.024 96.151,25.024 96.817,24.358 100.061,24.358 103.561,27.858 108.483,27.858 112.369,31.744 180.533,31.744 180.745,31.956 180.745,32.201 180.875,32.331 v1(180.875,32.409)
  Int2 (Sign) w0.102: v1(180.875,32.409) 180.875,32.357 180.718,32.2 180.718,32.067 180.778,32.007 184.156,32.007 184.761,32.613 195.68,32.613 195.805,32.737 196.295,32.737 196.42,32.613 204.091,32.613 204.532,33.054 204.532,33.138 204.18,33.49 J29.K1@203.939,33.49
SLOT8.LVDS_2_P: IC6.L25 J29.J1 | length 142
  Top Layer w0.095: IC6.L25@77.915,35.984 77.527,35.596 77.527,35.15 77.565,35.111 77.565,34.687 77.767,34.486 77.767,29.983 81.075,26.675 84.225,26.675 86.8,24.1 92.568,24.1 93.759,25.291 96.261,25.291 96.927,24.625 99.95,24.625 103.45,28.125 108.373,28.125 112.258,32.011 179.994,32.011 180.127,32.011 180.422,32.011 180.478,32.066 180.478,32.201 180.348,32.331 v1(180.348,32.409)
  Int2 (Sign) w0.102: v1(180.348,32.409) 180.348,32.357 180.505,32.2 180.505,31.978 180.689,31.793 184.245,31.793 184.85,32.399 195.769,32.399 195.894,32.523 196.206,32.523 196.331,32.399 204.179,32.399 204.746,32.965 204.746,33.138 205.098,33.49 J29.J1@205.339,33.49
SLOT8.LVDS_3_N: J29.I8 R146.1 R147.2 | length 127
  Top Layer w0.095: R147.2@89.687,54.866 89.707,54.866 89.87,55.029 89.87,55.045 89.926,55.101 90.249,55.101 90.271,55.079 90.312,55.079 R146.1@90.475,54.917 ; R146.1@90.475,54.897 R146.1@90.475,54.917 ; v1(91.383,54.483) 91.328,54.538 91.328,54.722 91.155,54.895 91.155,54.904 90.965,55.094 90.693,55.094 90.679,55.079 90.637,55.079 R146.1@90.475,54.917
  Layer 1 w0.102: v1(201.425,47.955) 201.425,47.986 201.55,48.111 201.786,48.111 202.275,48.6 207.207,48.6 207.432,48.375 207.432,48.083 J29.I8@206.839,47.49
  Bottom Layer w0.095: v1(91.383,54.483) 91.438,54.428 91.622,54.428 93.158,52.892 93.158,50.715 93.973,49.9 96.198,49.9 96.888,49.21 97.232,49.21 97.492,48.95 111.373,48.95 112.539,47.784 135.934,47.784 138.633,50.483 144.383,50.483 145.075,51.175 151.227,51.175 151.577,51.525 195.95,51.525 198.125,49.35 199.623,49.35 200.888,48.085 201.217,48.085 201.347,47.955 v1(201.425,47.955)
SLOT8.LVDS_3_P: J29.H8 R145.2 R146.2 | length 127.3
  Top Layer w0.095: R145.2@89.687,55.603 89.707,55.603 89.87,55.44 89.87,55.423 89.926,55.368 90.257,55.368 90.264,55.374 90.312,55.374 R146.2@90.475,55.537 ; R146.2@90.475,55.557 R146.2@90.475,55.537 ; v1(91.756,54.856) 91.7,54.911 91.516,54.911 91.421,55.006 91.421,55.015 91.076,55.36 90.693,55.36 90.679,55.374 90.637,55.374 R146.2@90.475,55.537
  Layer 1 w0.102: v1(201.425,48.482) 201.425,48.45 201.55,48.325 201.697,48.325 202.186,48.814 207.295,48.814 207.646,48.464 207.646,48.083 J29.H8@208.239,47.49
  Bottom Layer w0.095: v1(91.756,54.856) 91.811,54.8 91.811,54.616 93.425,53.002 93.425,50.825 94.083,50.167 96.308,50.167 96.999,49.476 97.343,49.476 97.602,49.217 111.483,49.217 112.65,48.051 135.823,48.051 138.523,50.75 144.273,50.75 144.964,51.441 151.116,51.441 151.467,51.792 196.061,51.792 198.236,49.617 199.733,49.617 200.999,48.351 201.217,48.351 201.347,48.482 v1(201.425,48.482)
SLOT8.LVDS_4_N: IC6.F4 J29.L8 | length 132
  Top Layer w0.095: IC6.F4@81.915,52.784 v1(82.315,53.184)
  Layer 1 w0.102: v1(82.315,53.184) 82.372,53.127 82.372,52.861 82.737,52.496 82.737,51.88 82.664,51.806 82.664,51.064 83.103,50.625 85.283,50.625 85.619,50.289 93.111,50.289 93.664,49.736 93.664,49.484 93.83,49.318 v1(93.83,49.275)
  Bottom Layer w0.095: v1(93.83,49.275) 93.83,49.192 93.7,49.062 93.7,47.05 94.825,45.925 104.248,45.925 105.639,47.317 136.439,47.317 138.998,49.875 145.048,49.875 145.648,50.475 152.148,50.475 152.573,50.9 195.402,50.9 198.177,48.125 198.989,48.125 199.12,47.994 199.981,47.994 201.275,46.7 202.873,46.7 203.205,47.032 203.205,47.111 202.826,47.49 J29.L8@202.639,47.49
SLOT8.LVDS_4_P: IC6.F5 J29.K8 | length 132
  Top Layer w0.095: IC6.F5@81.915,51.984 v1(82.315,52.384)
  Layer 1 w0.102: v1(82.315,52.384) 82.317,52.384 82.523,52.178 82.523,51.968 82.45,51.895 82.45,50.975 83.014,50.411 85.195,50.411 85.531,50.075 93.022,50.075 93.45,49.647 93.45,49.484 93.303,49.337 v1(93.303,49.275)
  Bottom Layer w0.095: v1(93.303,49.275) 93.303,49.192 93.433,49.062 93.433,46.939 94.714,45.658 104.358,45.658 105.75,47.05 136.55,47.05 139.108,49.608 145.158,49.608 145.758,50.208 152.258,50.208 152.683,50.633 195.292,50.633 198.067,47.858 198.878,47.858 199.009,47.727 199.871,47.727 201.164,46.433 202.984,46.433 203.472,46.921 203.472,47.111 203.852,47.49 J29.K8@204.039,47.49
SLOT8.LVDS_5_N: IC6.U2 J31.H3 | length 159.5
  Top Layer w0.095: IC6.U2@73.115,54.384 72.727,54.772 72.727,55.218 72.765,55.257 72.765,56.565 72.25,57.08 72.25,61.177 71.852,61.575 71.152,61.575 69.675,63.052 69.675,63.5 72.408,66.233 80.582,66.233 80.796,66.447 80.796,66.693 80.926,66.824 v1(80.926,66.901)
  Bottom Layer w0.095: v1(80.926,66.901) 80.926,66.824 80.796,66.693 80.796,66.429 80.975,66.25 81.4,66.25 81.8,66.65 86.873,66.65 91.823,71.6 99.598,71.6 102.737,74.739 112.696,74.739 112.71,74.725 114.764,74.725 114.778,74.739 115.993,74.739 116.131,74.601 116.58,74.601 116.719,74.739 117.506,74.739 117.595,74.651 117.967,74.651 117.99,74.673 119.384,74.673 119.407,74.651 119.73,74.651 119.819,74.739 121.142,74.739 121.516,74.365 124.85,74.365 125.108,74.624 127.699,74.624 128.576,74.624 128.601,74.648 132.197,74.648 132.22,74.625 132.53,74.625 132.671,74.767 163.583,74.767 164.733,73.617 177.611,73.617 178.1,73.127 181.11,73.127 181.125,73.142 182.858,73.142 185.325,70.675 198.319,70.675 198.459,70.816 198.943,70.816 199.677,71.55 200.13,71.55 200.28,71.7 208.373,71.7 208.705,72.032 208.705,72.111 208.326,72.49 J31.H3@208.139,72.49
SLOT8.LVDS_5_P: IC6.V1 J31.G3 | length 159.5
  Top Layer w0.095: IC6.V1@72.316,55.184 72.499,55.367 72.499,56.454 71.983,56.97 71.983,61.067 71.742,61.308 71.042,61.308 69.408,62.942 69.408,63.611 72.298,66.5 80.471,66.5 80.529,66.558 80.529,66.692 80.398,66.823 v1(80.398,66.9)
  Bottom Layer w0.095: v1(80.398,66.9) 80.398,66.823 80.529,66.692 80.529,66.319 80.864,65.983 81.511,65.983 81.911,66.383 86.983,66.383 91.933,71.333 99.708,71.333 102.848,74.473 112.586,74.473 112.6,74.459 114.875,74.459 114.889,74.473 115.882,74.473 116.021,74.334 116.691,74.334 116.829,74.473 117.396,74.473 117.484,74.384 118.078,74.384 118.101,74.406 119.273,74.406 119.296,74.384 119.841,74.384 119.929,74.473 121.031,74.473 121.405,74.099 124.96,74.099 125.219,74.357 127.588,74.357 128.687,74.357 128.711,74.381 132.087,74.381 132.109,74.359 132.641,74.359 132.782,74.5 163.473,74.5 164.623,73.35 177.5,73.35 177.989,72.861 181.221,72.861 181.235,72.875 182.748,72.875 185.214,70.409 198.429,70.409 198.57,70.55 199.053,70.55 199.788,71.284 200.241,71.284 200.39,71.433 208.484,71.433 208.972,71.921 208.972,72.111 209.352,72.49 J31.G3@209.539,72.49
SLOT8.LVDS_6_N: IC6.N2 J31.K3 | length 144.1
  Top Layer w0.095: IC6.N2@76.315,54.384 76.267,54.432 76.267,54.692 75.864,55.094 75.864,55.694 76.048,55.878 76.048,56.736 76.258,56.946 76.258,59.061 76.661,59.464 76.661,62.689 77.576,63.603 80.153,63.603 80.225,63.531 80.304,63.531 80.427,63.654 80.427,63.838 v1(80.482,63.893)
  Layer 1 w0.102: v1(182.525,71.775) 182.566,71.775 182.734,71.608 183.074,71.608 183.306,71.376 183.306,71.371 184.014,70.664 198.377,70.664 199.327,71.614 204.092,71.614 204.532,72.054 204.532,72.138 204.18,72.49 J31.K3@203.939,72.49
  Bottom Layer w0.095: v1(80.482,63.893) 80.564,63.893 80.76,64.089 80.861,64.089 82.498,65.725 87.348,65.725 92.373,70.75 99.948,70.75 101.885,72.687 110.284,72.687 110.448,72.85 117.928,72.85 118.388,73.311 125.742,73.311 125.969,73.083 133.193,73.083 133.421,73.311 136.714,73.311 137.108,72.917 163.633,72.917 164.233,72.317 181.363,72.317 182.085,71.594 182.317,71.594 182.498,71.775 v1(182.525,71.775)
SLOT8.LVDS_6_P: IC6.N1 J31.J3 | length 143.1
  Top Layer w0.095: IC6.N1@76.315,55.184 76.131,55.367 76.131,55.584 76.315,55.767 76.315,56.625 76.525,56.835 76.525,58.95 76.928,59.353 76.928,62.578 77.686,63.336 80.043,63.336 80.115,63.264 80.414,63.264 80.615,63.465 80.799,63.465 v1(80.855,63.52)
  Layer 1 w0.102: v1(182.684,71.197) 182.696,71.197 182.893,71.394 182.986,71.394 183.092,71.287 183.092,71.283 183.925,70.45 198.466,70.45 199.416,71.4 204.181,71.4 204.746,71.965 204.746,72.138 205.098,72.49 J31.J3@205.339,72.49
  Bottom Layer w0.095: v1(80.855,63.52) 80.855,63.603 81.05,63.799 81.05,63.9 82.608,65.458 87.458,65.458 92.483,70.483 100.058,70.483 101.995,72.42 110.395,72.42 110.558,72.584 118.038,72.584 118.498,73.044 125.631,73.044 125.859,72.816 133.304,72.816 133.532,73.044 136.604,73.044 136.998,72.65 163.523,72.65 164.123,72.05 181.252,72.05 181.975,71.328 182.476,71.328 182.607,71.197 v1(182.684,71.197)
SLOT8.LVDS_7_N: IC6.W1 J31.C4 | length 169.3
  Top Layer w0.095: IC6.W1@71.516,55.184 71.699,55.367 71.699,55.449 71.568,55.58 71.545,55.58 71.147,55.978 71.147,57.697 71.305,57.854 71.305,58.31 71.294,58.32 71.294,60.031 70.575,60.75 70.22,60.75 69.803,61.167 69.803,61.527 69.405,61.925 69.4,61.925 68.408,62.917 68.408,64.961 71.348,67.9 78.364,67.9 78.572,68.108 78.572,68.292 v1(78.627,68.348)
  Layer 1 w0.102: v1(180.925,74.175) 180.963,74.175 181.199,73.938 181.737,73.938 182.963,72.712 183.413,72.712 184.275,71.85 191.672,71.85 193.17,73.347 198.981,73.347 199.284,73.65 215.428,73.65 215.832,74.054 215.832,74.138 215.48,74.49 J31.C4@215.239,74.49
  Bottom Layer w0.095: v1(78.627,68.348) 78.683,68.403 78.867,68.403 79.127,68.664 86.161,68.664 91.173,73.675 99.198,73.675 102.802,77.28 117.059,77.28 117.446,77.667 128.308,77.667 128.9,77.075 130.023,77.075 130.768,77.821 175.104,77.821 178.917,74.008 180.276,74.008 180.29,73.994 180.711,73.994 180.892,74.175 v1(180.925,74.175)
SLOT8.LVDS_7_P: IC6.V3 J31.B4 | length 170.8
  Top Layer w0.095: IC6.V3@72.315,53.584 71.927,53.972 71.927,55.218 71.965,55.257 71.965,55.56 71.678,55.847 71.655,55.847 71.492,56.011 71.414,56.089 71.414,57.586 71.571,57.744 71.571,58.42 71.561,58.431 71.561,60.141 70.685,61.017 70.331,61.017 70.07,61.278 70.07,61.637 69.516,62.191 69.511,62.191 68.675,63.027 68.675,64.85 71.458,67.633 78.474,67.633 78.761,67.92 78.945,67.92 v1(79,67.975)
  Layer 1 w0.102: v1(180.925,73.575) 180.985,73.575 181.134,73.724 181.648,73.724 182.874,72.499 183.324,72.499 184.186,71.636 191.761,71.636 193.258,73.133 199.07,73.133 199.373,73.436 215.517,73.436 216.046,73.965 216.046,74.138 216.398,74.49 J31.B4@216.639,74.49
  Bottom Layer w0.095: v1(79,67.975) 79.055,68.03 79.055,68.214 79.238,68.397 86.272,68.397 91.283,73.408 99.308,73.408 102.913,77.013 117.169,77.013 117.556,77.4 128.198,77.4 128.789,76.808 130.133,76.808 130.879,77.554 174.994,77.554 178.806,73.742 180.165,73.742 180.179,73.727 180.717,73.727 180.869,73.575 v1(180.925,73.575)
SLOT8.LVDS_8_N: J31.F4 R112.1 R114.2 | length 160.3
  Top Layer w0.095: 74.829,59.327 74.829,59.42 74.843,59.434 74.843,59.476 75.005,59.638 R112.1@74.843,59.801 ; 74.829,59.327 74.829,59.082 74.885,59.026 74.908,59.026 75.071,58.864 R114.2@75.071,58.844 ; v1(74.924,61.601) 75.001,61.601 75.132,61.471 75.378,61.471 75.59,61.259 75.59,60.383 75.142,59.935 75.142,59.754 R112.1@75.025,59.638
  Bottom Layer w0.095: v1(74.924,61.601) 75.001,61.601 75.132,61.471 75.216,61.471 75.272,61.526 75.272,61.672 75.708,62.108 75.708,69.036 78.023,71.35 84.698,71.35 89.698,76.35 97.125,76.35 101.592,80.817 103.792,80.817 105.733,82.758 113.91,82.758 114.417,82.25 117.273,82.25 118.389,83.367 126.608,83.367 128.058,81.917 132.716,81.917 133.197,81.436 133.197,81.098 133.42,80.875 138.04,80.875 138.167,81.003 184.874,81.003 186.686,79.192 190.311,79.192 196.152,73.351 196.827,73.351 196.832,73.355 196.91,73.355 197.043,73.488 198.007,73.488 198.12,73.375 198.533,73.375 199.005,73.376 199.73,74.1 201.452,74.1 201.927,73.625 202.151,73.625 211.198,73.625 211.605,74.032 211.605,74.111 211.226,74.49 J31.F4@211.039,74.49
SLOT8.LVDS_8_P: J31.E4 R111.2 R112.2 | length 160.3
  Top Layer w0.095: R111.2@74.321,58.844 74.321,58.864 74.483,59.026 74.507,59.026 74.562,59.082 74.562,59.216 ; R112.2@74.365,59.638 R112.2@74.385,59.638 ; 74.562,59.217 74.562,59.42 74.548,59.434 74.548,59.476 R112.2@74.385,59.638 ; v1(74.925,61.073) 75.002,61.073 75.133,61.204 75.268,61.204 75.323,61.148 75.323,60.494 74.98,60.15 74.851,60.15 74.621,59.92 74.621,59.874 R112.2@74.385,59.638
  Bottom Layer w0.095: v1(74.925,61.073) 75.002,61.073 75.133,61.204 75.327,61.204 75.539,61.416 75.539,61.561 75.975,61.998 75.975,68.925 78.133,71.083 84.808,71.083 89.808,76.083 97.236,76.083 101.702,80.55 103.902,80.55 105.843,82.491 113.799,82.491 114.307,81.983 117.383,81.983 118.5,83.1 126.498,83.1 127.948,81.65 132.606,81.65 132.931,81.325 132.931,80.987 133.309,80.609 138.15,80.609 138.2,80.658 138.207,80.658 138.286,80.736 184.764,80.736 186.575,78.925 190.2,78.925 196.041,73.084 196.938,73.084 196.942,73.088 197.02,73.088 197.153,73.222 197.897,73.222 198.009,73.109 198.644,73.109 199.116,73.109 199.84,73.833 201.342,73.833 201.817,73.358 202.041,73.358 211.309,73.358 211.872,73.921 211.872,74.111 212.252,74.49 J31.E4@212.439,74.49
SLOT8.LVDS_9_N: J31.I4 R70.1 R72.2 | length 152.6
  Top Layer w0.095: v1(200.728,72.25) 200.786,72.308 200.786,72.581 200.858,72.653 200.858,73.136 201.398,73.675 207.048,73.675 207.405,74.032 207.405,74.111 207.026,74.49 J31.I4@206.839,74.49
  Bottom Layer w0.095: R72.2@76.647,58.835 76.647,58.855 76.484,59.018 76.444,59.018 76.345,59.116 76.345,59.429 76.359,59.443 76.359,59.484 76.521,59.647 76.359,59.809 76.359,59.851 76.345,59.865 76.345,59.999 76.44,60.094 76.463,60.094 76.675,60.306 76.675,68.575 78.397,70.297 85.347,70.297 90.233,75.183 97.861,75.183 101.727,79.05 104.602,79.05 105.94,80.387 119.932,80.387 120.164,80.619 124.249,80.619 124.334,80.534 124.866,80.534 124.951,80.619 127.304,80.619 128.099,79.824 133.687,79.824 133.986,79.525 179.342,79.525 181.767,77.1 187.181,77.1 187.194,77.114 190.186,77.114 194.927,72.373 196.918,72.373 197.12,72.575 197.7,72.575 198.242,72.033 199.344,72.033 199.886,72.575 200.434,72.575 200.547,72.688 200.803,72.688 200.858,72.632 200.858,72.458 200.728,72.328 v1(200.728,72.25)
SLOT8.LVDS_9_P: J31.H4 R69.2 R70.2 | length 153.4
  Top Layer w0.095: v1(201.255,72.25) 201.197,72.308 201.197,72.581 201.125,72.653 201.125,73.025 201.508,73.408 207.159,73.408 207.672,73.921 207.672,74.111 208.052,74.49 J31.H4@208.239,74.49
  Bottom Layer w0.095: R69.2@75.864,58.83 75.864,58.85 76.078,59.064 76.078,59.429 76.064,59.443 76.064,59.484 75.901,59.647 76.064,59.809 76.064,59.851 76.078,59.865 76.078,60.11 76.329,60.361 76.353,60.361 76.408,60.417 76.408,68.686 78.286,70.564 85.236,70.564 90.123,75.45 97.75,75.45 101.617,79.317 104.492,79.317 105.829,80.654 119.822,80.654 120.053,80.886 124.36,80.886 124.445,80.8 124.755,80.8 124.84,80.886 127.414,80.886 128.21,80.09 133.798,80.09 134.096,79.792 179.452,79.792 181.877,77.367 187.07,77.367 187.084,77.38 190.297,77.38 195.038,72.639 196.808,72.639 197.01,72.842 197.811,72.842 198.352,72.3 199.233,72.3 199.775,72.842 200.324,72.842 200.436,72.954 200.913,72.954 201.125,72.742 201.125,72.458 201.255,72.328 v1(201.255,72.25)